# EAGLE board end of thursday lab v7 (EAGLE 9.7.0)
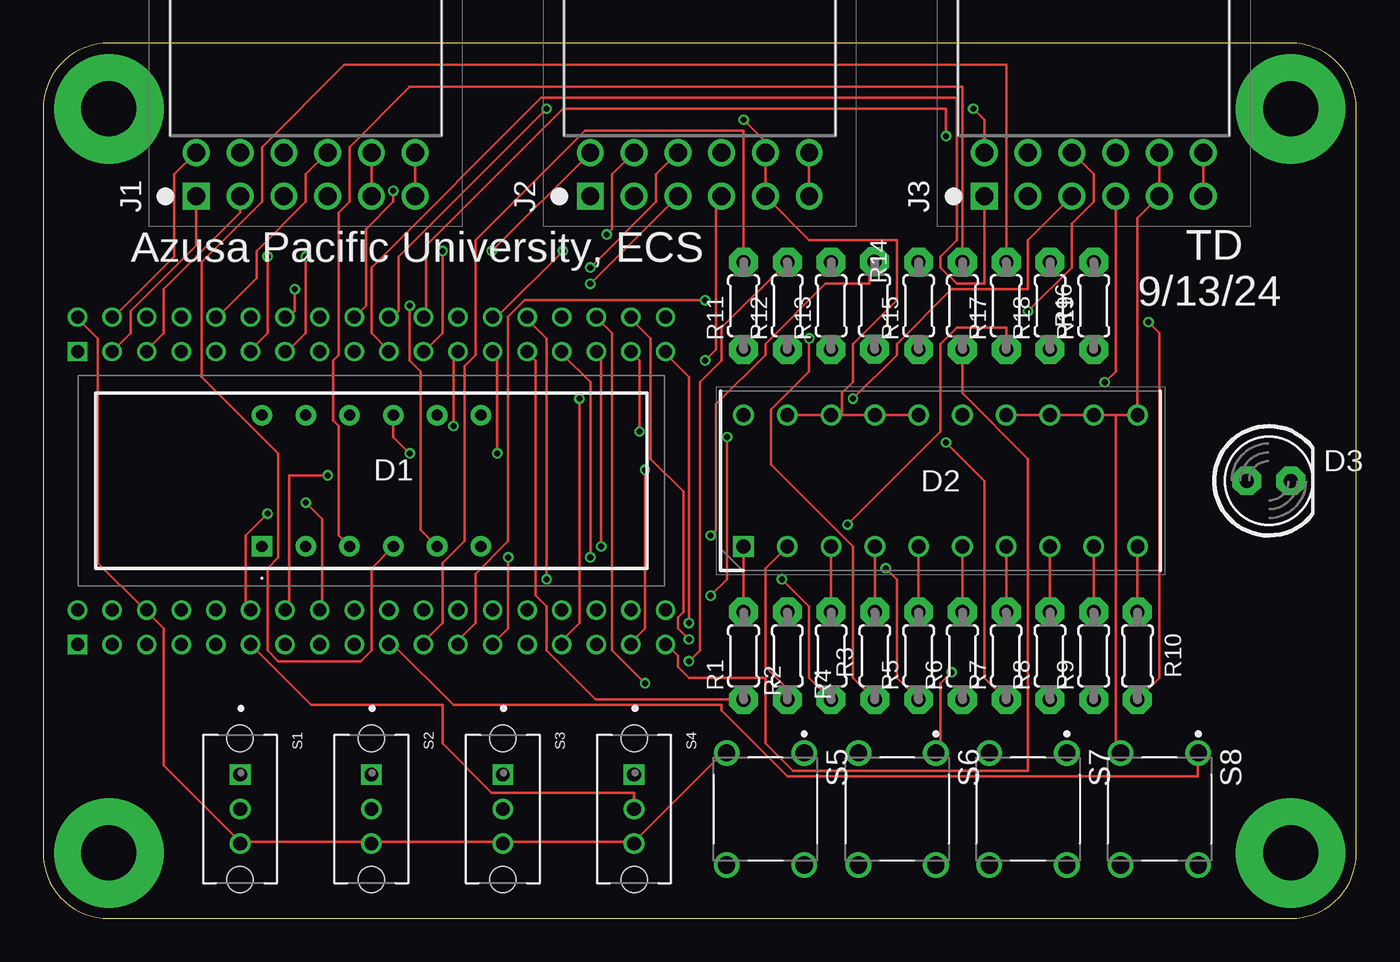
[diagram p0: board, top side]
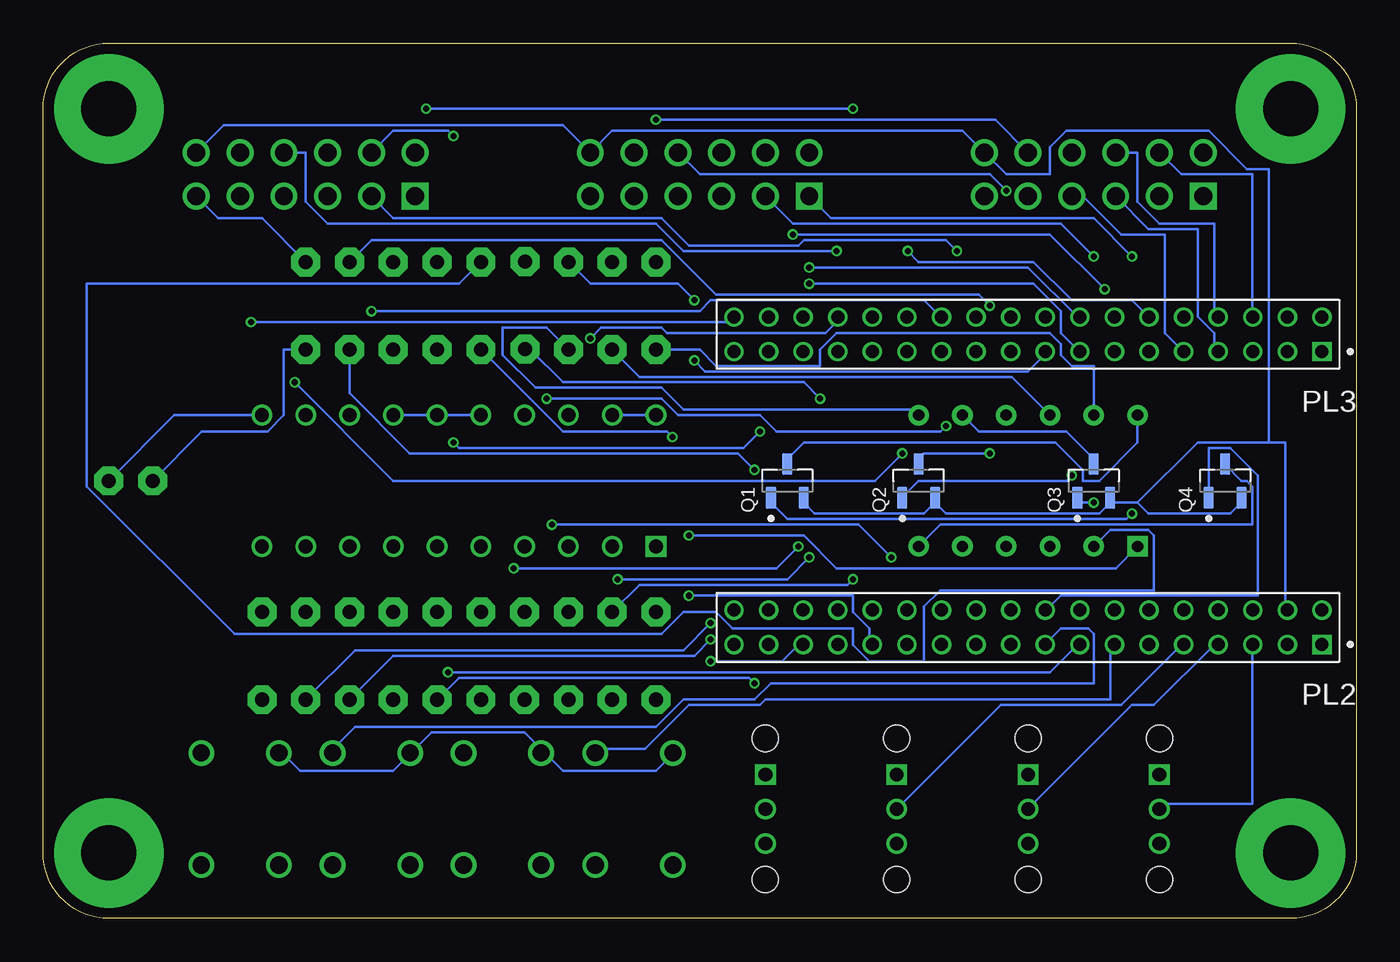
[diagram p1: board, bottom side, seen from below]

Size 76.2 x 50.8 mm. Coordinates in mm from the lower left corner, seen from the top.
Outline: 3.81,0 72.39,0 arc90 76.2,3.81 76.2,46.99 arc90 72.39,50.8 3.81,50.8 arc90 0,46.99 0,3.81 arc90 3.81,0
Copper layers (1*16): Top / Bottom
Stack-up Default Layer Stack: Top User Defined 0.035559375mm / Dielectric-1 User Defined 1.6mm / Bottom User Defined 0.035559375mm
Design rules: minimum copper width 6mil, minimum drill size 10mil, copper clearance wire_polygon to wire_polygon 6mil, copper clearance wire_polygon to pad_smd 6mil, copper clearance wire_polygon to via 6mil, copper clearance pad_smd to pad_smd 6mil, copper clearance pad_smd to via 6mil, copper clearance via to via 6mil, copper clearance smd to pad (same net) 6mil, copper clearance smd to via (same net) 6mil, copper clearance smd to smd (same net) 6mil, dimension clearance 15mil, restrict clearance 0mil, via restrict clearance 0mil, drill distance 6mil, keepout clearance 0mil

## Footprints (pad centres in the part's own frame; a part is rotated, then mirrored left to right if it is on the bottom)
LDQM282RI = drill 0.65 pad 1.192 square: 1 0,0 | drill 0.65 pad 1.192: 2 2.54,0; 3 5.08,0; 4 7.62,0; 5 10.16,0; 6 12.7,0; 7 12.7,7.62; 8 10.16,7.62; 9 7.62,7.62; 10 5.08,7.62; 11 2.54,7.62; 12 0,7.62
DIPS762W50P254L2527H825Q20N = drill 0.8 pad 1.2 square: 1 0,0 | drill 0.8 pad 1.2: 2 0,-2.54; 3 0,-5.08; 4 0,-7.62; 5 0,-10.16; 6 0,-12.7; 7 0,-15.24; 8 0,-17.78; 9 0,-20.32; 10 0,-22.86; 11 7.62,-22.86; 12 7.62,-20.32; 13 7.62,-17.78; 14 7.62,-15.24; 15 7.62,-12.7; 16 7.62,-10.16; 17 7.62,-7.62; 18 7.62,-5.08; 19 7.62,-2.54; 20 7.62,0
LED5MM = drill 0.813 pad 1.676 octagon: A -1.27,0; K 1.27,0
PMOD-SOCKET-FOR-HOST-BOARD = drill 1.04 pad 1.55 square: 1 0,0 | drill 1.04 pad 1.55: 2 2.54,0; 3 5.08,0; 4 7.62,0; 5 10.16,0; 6 12.7,0; 7 0,2.54; 8 2.54,2.54; 9 5.08,2.54; 10 7.62,2.54; 11 10.16,2.54; 12 12.7,2.54
MT_125_250 = drill 3.175 pad 6.35: 1 0,0
TE_4-1734506-1 = drill 0.75 pad 1.1 square: 1 0,0 | drill 0.75 pad 1.1: 2 0,-2; 3 2.007,0; 4 2.007,-2; 5 4.013,0; 6 4.013,-2; 7 6.02,0; 8 6.02,-2; 9 8.026,0; 10 8.026,-2; 11 10.033,0; 12 10.033,-2; 13 12.04,0; 14 12.04,-2; 15 14.046,0; 16 14.046,-2; 17 16.053,0; 18 16.053,-2; 19 18.059,0; 20 18.059,-2; 21 20.066,0; 22 20.066,-2; 23 22.073,0; 24 22.073,-2; 25 24.079,0; 26 24.079,-2; 27 26.086,0; 28 26.086,-2; 29 28.092,0; 30 28.092,-2; 31 30.099,0; 32 30.099,-2; 33 32.106,0; 34 32.106,-2; 35 34.112,0; 36 34.112,-2
SOT95P230X110-3N = smd 1.26 x 0.59: 1 -0.98,0.95; 2 -0.98,-0.95; 3 0.98,0
0204/5 = drill 0.813 pad 1.676 octagon: 1 -2.54,0; 2 2.54,0
SW_OS102011MS2QN1 = drill 0.8 square: 1 -2,0 | drill 0.8: 2 0,0; 3 2,0 | hole 1.5: -4.1,0; 4.1,0
SW_1825910-7 = drill 0.99: 1 -3.25,2.25; 2 3.25,2.25; 3 -3.25,-2.25; 4 3.25,-2.25

## Placement (x,y rotation side)
D1  [LDQM282RI]  12.7,21.59 0 top
D2  [DIPS762W50P254L2527H825Q20N]  40.64,21.59 90 top
D3  [LED5MM]  71.12,25.4 0 top
J1  [PMOD-SOCKET-FOR-HOST-BOARD]  8.89,41.91 0 top
J2  [PMOD-SOCKET-FOR-HOST-BOARD]  31.75,41.91 0 top
J3  [PMOD-SOCKET-FOR-HOST-BOARD]  54.61,41.91 0 top
MT1  [MT_125_250]  72.39,3.81 0 top
MT2  [MT_125_250]  3.81,3.81 0 top
MT3  [MT_125_250]  72.39,46.99 0 top
MT4  [MT_125_250]  3.81,46.99 0 top
PL2  [TE_4-1734506-1]  2,15.9 180 bottom
PL3  [TE_4-1734506-1]  2,32.9 180 bottom
Q1  [SOT95P230X110-3N]  33.02,25.4 90 bottom
Q2  [SOT95P230X110-3N]  25.4,25.4 90 bottom
Q3  [SOT95P230X110-3N]  15.24,25.4 90 bottom
Q4  [SOT95P230X110-3N]  7.62,25.4 90 bottom
R1  [0204/5]  40.64,15.24 90 top
R2  [0204/5]  43.18,15.24 270 top
R3  [0204/5]  45.72,15.24 90 top
R4  [0204/5]  48.26,15.24 90 top
R5  [0204/5]  50.8,15.24 90 top
R6  [0204/5]  53.34,15.24 90 top
R7  [0204/5]  55.88,15.24 90 top
R8  [0204/5]  58.42,15.24 90 top
R9  [0204/5]  60.96,15.24 90 top
R10  [0204/5]  63.5,15.24 90 top
R11  [0204/5]  40.64,35.56 90 top
R12  [0204/5]  43.18,35.56 90 top
R13  [0204/5]  45.72,35.56 90 top
R14  [0204/5]  48.24,35.58 90 top
R15  [0204/5]  50.8,35.56 90 top
R16  [0204/5]  53.34,35.56 90 top
R17  [0204/5]  55.88,35.56 90 top
R18  [0204/5]  58.42,35.56 90 top
R19  [0204/5]  60.96,35.56 90 top
S1  [SW_OS102011MS2QN1]  11.43,6.35 270 top
S2  [SW_OS102011MS2QN1]  19.05,6.35 270 top
S3  [SW_OS102011MS2QN1]  26.67,6.35 270 top
S4  [SW_OS102011MS2QN1]  34.29,6.35 270 top
S5  [SW_1825910-7]  41.91,6.35 270 top
S6  [SW_1825910-7]  49.56,6.35 270 top
S7  [SW_1825910-7]  57.15,6.35 270 top
S8  [SW_1825910-7]  64.77,6.35 270 top

## Library data of the parts
D1 = eagle-library-engr-240-f24; DESCRIPTION: LED Displays & Accessories LED Display; HEIGHT: 6.05mm; MANUFACTURER_NAME: Lumex; MANUFACTURER_PART_NUMBER: LDQ-M282RI; MOUSER_PART_NUMBER: 696-LDQ-M282RI; MOUSER_PRICE-STOCK: https://www.mouser.com/Search/Refine.aspx?Keyword=696-LDQ-M282RI
D2 = eagle-library-engr-240-f24; DESCRIPTION: LED Uni-Color Green 565nm 20-Pin PDIP; HEIGHT: 8.25mm; MANUFACTURER_NAME: Lite-On; MANUFACTURER_PART_NUMBER: LTA-1000G; MOUSER_PART_NUMBER: 859-LTA-1000G; MOUSER_PRICE-STOCK: https://www.mouser.co.uk/ProductDetail/Lite-On/LTA-1000G?qs=%2FTKcI5XXRKq0QINzVmwJHg%3D%3D
D3 J1-J3 MT1-MT4 PL2 PL3 R1-R19 = eagle-library-engr-240-f24
Q1-Q4 = eagle-library-engr-240-f24; MANUFACTURER: Nexperia; MAXIMUM_PACKAGE_HEIGHT: 1.10 mm; PARTREV: 1; SNAPEDA_PN: NX2301P; STANDARD: IPC 7351B
S1-S4 = eagle-library-engr-240-f24; MANUFACTURER: C&K; STANDARD: MANUFACTURER RECOMMENDATIONS
S5-S8 = eagle-library-engr-240-f24; MANUFACTURER: TE Connectivity; PARTREV: C10; STANDARD: Manufacturer Recommendation

## Nets
3.3V: J1.6 J1.12 J2.6 J2.12 J3.6 J3.12 PL2.4 Q1.2 Q2.2 Q3.2 Q4.2 R19.2
BAR_1: PL3.27 R1.1
BAR_2: PL3.28 R2.1
BAR_3: PL3.29 R3.1
BAR_4: PL3.30 R4.1
BAR_5: PL3.31 R5.1
BAR_6: PL3.32 R6.1
BAR_7: PL3.33 R7.1
BAR_8: PL3.34 R8.1
BAR_9: PL3.35 R9.1
BAR_10: PL3.36 R10.1
BUTTON_1: PL2.13 S5.1
BUTTON_2: PL2.15 S6.1
BUTTON_3: PL2.17 S7.1
BUTTON_4: PL2.19 S8.1
DIGIT_1: PL2.12 Q1.1
DIGIT_1_A: D1.12 Q1.3
DIGIT_2: PL2.14 Q2.1
DIGIT_2_A: D1.9 Q2.3
DIGIT_3: PL2.16 Q3.1
DIGIT_3_A: D1.8 Q3.3
DIGIT_4: PL2.18 Q4.1
DIGIT_4_A: D1.6 Q4.3
GND: D2.11 D2.12 D2.13 D2.14 D2.15 D2.16 D2.17 D2.18 D2.19 D2.20 D3.K J1.5 J1.11 J2.5 J2.11 J3.5 J3.11 PL2.6 PL3.2 S1.3 S2.3 S3.3 S4.3 S5.3 S6.3 S7.3 S8.3
N$1: D2.1 R1.2
N$2: D2.2 R2.2
N$3: D2.3 R3.2
N$4: D2.4 R4.2
N$5: D2.5 R5.2
N$6: D2.6 R6.2
N$7: D2.7 R7.2
N$8: D2.8 R8.2
N$9: D2.9 R9.2
N$10: D2.10 R10.2
N$11: D1.11 R11.1
N$12: D1.10 R12.1
N$13: D1.2 R15.2
N$14: D1.7 R13.1
N$15: D1.3 R16.2
N$16: D1.1 R14.2
N$17: D1.4 R17.2
N$18: D1.5 R18.2
N$20: D3.A R19.1
PMOD_1_1: J1.1 PL3.3
PMOD_1_2: J1.2 PL3.5
PMOD_1_3: J1.3 PL3.7
PMOD_1_4: J1.4 PL3.9
PMOD_1_5: J1.7 PL3.4
PMOD_1_6: J1.8 PL3.6
PMOD_1_7: J1.9 PL3.8
PMOD_1_8: J1.10 PL3.10
PMOD_2_1: J2.1 PL3.11
PMOD_2_2: J2.2 PL3.13
PMOD_2_3: J2.3 PL3.15
PMOD_2_4: J2.4 PL3.17
PMOD_2_5: J2.7 PL3.12
PMOD_2_6: J2.8 PL3.14
PMOD_2_7: J2.9 PL3.16
PMOD_2_8: J2.10 PL3.18
PMOD_3_1: J3.1 PL3.19
PMOD_3_2: J3.2 PL3.21
PMOD_3_3: J3.3 PL3.23
PMOD_3_4: J3.4 PL3.25
PMOD_3_5: J3.7 PL3.20
PMOD_3_6: J3.8 PL3.22
PMOD_3_7: J3.9 PL3.24
PMOD_3_8: J3.10 PL3.26
SEGMENT_A: PL2.21 R11.2
SEGMENT_B: PL2.23 R13.2
SEGMENT_C: PL2.25 R17.1
SEGMENT_D: PL2.27 R15.1
SEGMENT_DP: PL2.35 R16.1
SEGMENT_E: PL2.29 R14.1
SEGMENT_F: PL2.31 R12.2
SEGMENT_G: PL2.33 R18.1
SWITCH_1: PL2.5 S1.2
SWITCH_2: PL2.7 S2.2
SWITCH_3: PL2.9 S3.2
SWITCH_4: PL2.11 S4.2

## Tracks (layer width: path | path; a pad name or v marks a point on that pad's centre or on a via)
3.3V
  Top 0.152: J3.12 J3.6 | J1.12 J1.6 | J2.12 J2.6
  Bottom 0.152: 24.45,24.13 25.08,23.5 31.43,23.5 32.07,24.13 Q1.2 | 12.7,24.13 12.06,23.5 7.3,23.5 6.67,24.13 Q4.2 | 14.29,24.13 12.7,24.13 | 5.08,27.62 9.21,27.62 12.7,24.13 | 5.08,27.62 4.13,27.62 4.13,18.1 PL2.4 | 24.45,24.13 23.81,23.5 14.92,23.5 14.29,24.13 | 24.45,24.13 Q2.2 | 14.29,24.13 Q3.2 | R19.2 63.5,40.64 66.04,40.64 J3.6 | J3.12 65.72,46.04 46.04,46.04 J2.12 43.18,45.72 22.86,45.72 J1.12 20.32,43.18 17.78,43.18 17.78,44.77 16.83,45.72 8.57,45.72 6.35,43.5 5.08,43.5 5.08,27.62
BAR_1
  Top 0.152: R1.1 32.07,12.7 29.21,15.56 29.21,18.1 28.57,18.73 28.57,32.38 28.26,32.7 PL3.27
BAR_2  (via drill 0.35)
  Top 0.152: v29.21,19.68 29.21,33.66 28.26,34.61 PL3.28
  Bottom 0.152: v29.21,19.68 29.53,19.37 41.59,19.37 R2.1
BAR_3  (via drill 0.35)
  Top 0.152: v31.75,20.95 31.75,31.11 30.16,32.7 PL3.29 | v42.86,19.68 44.45,18.1 44.45,13.97 R3.1
  Bottom 0.152: v31.75,20.95 33.02,19.68 v42.86,19.68
BAR_4  (via drill 0.35)
  Top 0.152: v44.45,33.66 44.45,31.75 42.23,29.53 42.23,26.35 46.99,21.59 46.99,13.97 R4.1
  Bottom 0.152: v44.45,33.66 43.81,34.29 40.32,34.29 40.01,33.97 30.8,33.97 30.16,34.61 PL3.30
BAR_5  (via drill 0.35)
  Top 0.152: v32.38,21.59 32.38,32.7 PL3.31 | v48.9,20.32 49.53,19.68 49.53,13.97 R5.1
  Bottom 0.152: v32.38,21.59 33.66,20.32 v48.9,20.32
BAR_6  (via drill 0.35)
  Top 0.152: v34.92,13.65 33.02,15.56 33.02,33.97 32.38,34.61 PL3.32
  Bottom 0.152: v34.92,13.65 35.24,13.97 52.07,13.97 R6.1
BAR_7  (via drill 0.35)
  Top 0.152: v34.61,28.26 34.61,32.38 34.29,32.7 PL3.33 | v52.39,27.62 54.61,25.4 54.61,13.97 R7.1
  Bottom 0.152: v34.61,28.26 35.56,27.3 52.07,27.3 v52.39,27.62
BAR_8  (via drill 0.35)
  Top 0.152: v37.47,16.19 36.83,16.83 36.83,17.46 37.15,17.78 37.15,24.77 35.24,26.67 35.24,33.66 34.29,34.61 PL3.34
  Bottom 0.152: v37.47,16.19 38.42,15.24 55.88,15.24 R8.1
BAR_9  (via drill 0.35)
  Top 0.152: v37.47,17.14 37.47,31.43 36.2,32.7 PL3.35
  Bottom 0.152: v37.47,17.14 39.05,15.56 58.1,15.56 R9.1
BAR_10  (via drill 0.35)
  Top 0.152: v64.14,34.61 64.77,33.97 64.77,13.97 R10.1
  Bottom 0.152: v64.14,34.61 36.2,34.61 PL3.36
BUTTON_1
  Bottom 0.152: PL2.13 14.29,15.88 14.29,12.7 34.29,12.7 34.61,12.38 38.73,12.38 41.27,9.84 44.13,9.84 S5.1
BUTTON_2  (via drill 0.35)
  Top 0.152: v52.7,14.29 52.07,13.65 52.07,9.84 S6.1
  Bottom 0.152: v52.7,14.29 17.78,14.29 16.19,15.88 PL2.15
BUTTON_3
  Bottom 0.152: PL2.17 17.78,16.19 17.14,16.83 15.56,16.83 15.24,16.51 15.24,13.65 33.97,13.65 34.92,12.7 39.05,12.7 40.64,11.11 58.1,11.11 59.37,9.84 S7.1
BUTTON_4
  Top 0.152: PL2.19 20.32,15.88 23.81,12.38 39.37,12.38 39.37,12.06 43.18,8.26 66.99,8.26 66.99,9.53 S8.1
DIGIT_1  (via drill 0.35)
  Top 0.152: v13.02,23.5 11.75,22.23 11.75,18.1 PL2.12
  Bottom 0.152: v13.02,23.5 13.34,23.18 33.02,23.18 33.97,24.13 Q1.1
DIGIT_1_A
  Bottom 0.152: D1.12 12.7,27.62 14.92,25.4 15.88,25.4 15.88,26.04 17.46,27.62 32.07,27.62 33.02,26.67 Q1.3
DIGIT_2  (via drill 0.35)
  Top 0.152: v16.51,25.72 14.29,25.72 14.29,18.1 PL2.14
  Bottom 0.152: v16.51,25.72 16.83,25.4 25.4,25.4 26.35,24.45 Q2.1
DIGIT_2_A  (via drill 0.35)
  Top 0.152: v21.27,26.99 20.32,27.94 D1.9
  Bottom 0.152: v21.27,26.99 25.08,26.99 25.4,26.67 Q2.3
DIGIT_3  (via drill 0.35)
  Top 0.152: v15.24,24.13 16.19,23.18 16.19,18.1 PL2.16
  Bottom 0.152: v15.24,24.13 16.19,24.13 Q3.1
DIGIT_3_A
  Bottom 0.152: D1.8 21.91,28.26 16.83,28.26 15.24,26.67 Q3.3
DIGIT_4
  Bottom 0.152: Q4.1 8.57,24.45 8.57,27.3 7.3,27.3 5.71,25.72 5.71,18.73 17.14,18.73 17.78,18.1 PL2.18
DIGIT_4_A
  Bottom 0.152: D1.6 24.13,22.86 6.03,22.86 6.03,25.08 6.35,25.4 6.67,25.4 7.62,26.35 Q4.3
GND  (via drill 0.35)
  Top 0.152: J1.11 J1.5 | v40.64,46.35 41.91,45.09 J2.11 J2.5 44.45,39.37 49.53,39.37 49.53,35.88 46.99,33.34 46.99,31.11 46.35,30.48 46.35,29.21 | D2.19 D2.18 46.35,29.21 | 46.35,29.21 D2.17 D2.16 | J3.11 J3.5 63.5,40.64 D2.11 62.23,29.21 | D2.14 D2.13 D2.12 62.23,29.21 | 34.29,4.45 39.37,9.53 S5.3 | 11.43,4.45 6.99,8.89 6.99,16.83 6.03,17.78 PL2.6 5.71,18.1 3.17,20.64 3.17,33.66 2.22,34.61 PL3.2 | 11.43,4.45 19.05,4.45 | 11.43,4.45 S1.3 | 19.05,4.45 26.67,4.45 | 19.05,4.45 S2.3 | 26.67,4.45 34.29,4.45 | 34.29,4.45 S4.3 | 26.67,4.45 S3.3 | 62.23,29.21 62.23,9.84 S8.3
  Bottom 0.152: J1.11 20.95,46.35 v40.64,46.35 | D2.19 D2.20 | D2.16 D2.15 D2.14 | D3.K 68.58,29.21 D2.11 | S8.3 62.23,9.53 61.28,8.57 55.88,8.57 54.93,9.53 S7.3 54.61,9.84 53.66,10.79 48.26,10.79 47.31,9.84 S6.3 46.99,9.53 46.04,8.57 40.64,8.57 39.69,9.53 S5.3
N$1
  Top 0.152: R1.2 D2.1
N$2
  Top 0.152: D2.2 41.91,20.32 41.91,14.61 43.18,13.34 R2.2
N$3
  Top 0.152: R3.2 D2.3
N$4
  Top 0.152: R4.2 D2.4
N$5
  Top 0.152: R5.2 D2.5
N$6
  Top 0.152: R6.2 D2.6
N$7
  Top 0.152: R7.2 D2.7
N$8
  Top 0.152: R8.2 D2.8
N$9
  Top 0.152: R9.2 D2.9
N$10
  Top 0.152: R10.2 D2.10
N$11
  Bottom 0.152: D1.11 15.24,32.07 16.51,32.07 17.14,32.7 17.14,33.34 17.78,33.97 30.16,33.97 31.11,33.02 31.11,32.07 37.15,32.07 38.1,33.02 R11.1
N$12
  Bottom 0.152: D1.10 20,31.43 41.59,31.43 R12.1
N$13
  Bottom 0.152: D1.2 14.29,22.54 12.06,22.54 11.75,22.23 11.75,19.05 24.13,19.05 25.08,18.1 25.08,14.92 28.26,14.92 29.21,15.88 29.21,16.83 36.2,16.83 37.15,17.78 39.05,17.78 40.32,16.51 65.09,16.51 73.66,25.08 73.66,36.83 52.07,36.83 R15.2
N$14
  Bottom 0.152: D1.7 25.72,29.53 39.05,29.53 40.32,30.8 47.62,30.8 49.53,32.7 49.53,34.29 46.99,34.29 R13.1
N$15
  Top 0.152: D1.3 17.14,22.23 17.14,28.57 16.83,28.89 16.83,32.38 17.14,32.7 17.14,40.96 17.78,41.59 17.78,44.77 21.27,48.26 53.34,48.26 R16.2
N$16  (via drill 0.35)
  Top 0.152: v38.73,22.23 39.05,22.54 39.05,29.84 41.91,32.7 41.91,33.34 45.4,36.83 47.94,36.83 47.94,38.1 R14.2
  Bottom 0.152: D1.1 13.97,20.32 30.16,20.32 32.07,22.23 v38.73,22.23
N$17
  Top 0.152: D1.4 19.05,20.32 19.05,15.56 18.41,14.92 13.65,14.92 13.02,15.56 13.02,20.32 13.65,20.95 13.65,26.99 9.21,31.43 9.21,38.1 12.7,41.59 12.7,44.77 17.46,49.53 55.88,49.53 R17.2
N$18  (via drill 0.35)
  Top 0.152: D1.5 21.91,22.54 21.91,31.75 21.27,32.38 v21.27,35.56
  Bottom 0.152: v21.27,35.56 21.91,36.2 37.15,36.2 40.32,39.37 57.15,39.37 R18.2
N$20
  Bottom 0.152: D3.A 66.99,28.26 63.18,28.26 62.23,29.21 62.23,33.02 R19.1
PMOD_1_1
  Top 0.152: J1.1 8.89,39.05 5.08,35.24 5.08,33.97 4.13,33.02 PL3.3
PMOD_1_2
  Top 0.152: J1.2 11.43,40.96 6.99,36.51 6.99,33.97 6.03,33.02 PL3.5
PMOD_1_3
  Bottom 0.152: J1.3 12.06,40.01 9.21,40.01 9.21,34.92 8.26,33.97 8.26,33.02 PL3.7
PMOD_1_4
  Bottom 0.152: J1.4 15.88,41.91 13.65,39.69 11.11,39.69 11.11,33.97 10.16,33.02 PL3.9
PMOD_1_5
  Top 0.152: J1.7 7.62,43.18 7.62,38.42 4.13,34.92 PL3.4
PMOD_1_6
  Bottom 0.152: J1.8 10.16,43.18 6.03,43.18 6.03,34.92 PL3.6
PMOD_1_7
  Bottom 0.152: J1.9 12.7,44.45 12.7,41.59 11.43,40.32 8.26,40.32 8.26,34.92 PL3.8
PMOD_1_8
  Top 0.152: J1.10 15.24,43.18 15.24,41.59 12.38,38.73 12.38,37.15 10.16,34.92 PL3.10
PMOD_2_1  (via drill 0.35)
  Top 0.152: v13.02,38.42 13.02,33.97 12.06,33.02 PL3.11
  Bottom 0.152: v13.02,38.42 15.24,40.64 30.48,40.64 J2.1
PMOD_2_2  (via drill 0.35)
  Top 0.152: v15.24,38.42 15.24,33.97 14.29,33.02 PL3.13
  Bottom 0.152: v15.24,38.42 17.14,40.32 32.7,40.32 J2.2
PMOD_2_3  (via drill 0.35)
  Top 0.152: J2.3 v31.75,36.83
  Bottom 0.152: v31.75,36.83 18.73,36.83 17.14,35.24 17.14,33.97 16.19,33.02 PL3.15
PMOD_2_4  (via drill 0.35)
  Top 0.152: v38.42,32.38 39.05,33.02 39.05,41.59 J2.4
  Bottom 0.152: v38.42,32.38 37.78,31.75 19.05,31.75 18.1,32.7 PL3.17
PMOD_2_5  (via drill 0.35)
  Top 0.152: J2.7 v26.04,38.73
  Bottom 0.152: v26.04,38.73 25.4,38.1 18.73,38.1 16.51,35.88 13.02,35.88 12.06,34.92 PL3.12
PMOD_2_6  (via drill 0.35)
  Top 0.152: v14.61,36.51 14.61,35.24 14.29,34.92 PL3.14 | v32.7,39.69 33.02,40.01 33.02,43.18 J2.8
  Bottom 0.152: v14.61,36.51 17.78,39.69 v32.7,39.69
PMOD_2_7  (via drill 0.35)
  Top 0.152: v31.75,37.78 35.56,41.59 35.56,43.18 J2.9
  Bottom 0.152: v31.75,37.78 19.05,37.78 16.19,34.92 PL3.16
PMOD_2_8  (via drill 0.35)
  Top 0.152: v20.32,42.23 20.32,41.59 18.73,40.01 18.73,35.56 18.1,34.92 PL3.18
  Bottom 0.152: v20.32,42.23 21.27,43.18 38.1,43.18 J2.10
PMOD_3_1
  Top 0.152: J3.1 54.61,36.83 53.02,36.83 52.07,37.78 52.07,38.42 53.02,39.37 53.02,47.62 28.89,47.62 19.05,37.78 19.05,33.97 20,33.02 PL3.19
PMOD_3_2  (via drill 0.35)
  Top 0.152: v23.18,38.73 23.18,33.97 22.23,33.02 PL3.21
  Bottom 0.152: v23.18,38.73 23.81,39.37 32.07,39.37 32.38,39.05 38.73,39.05 40.32,40.64 55.88,40.64 J3.2
PMOD_3_3  (via drill 0.35)
  Top 0.152: v23.81,28.57 23.81,32.7 PL3.23 | v46.99,30.16 49.53,32.7 49.53,33.34 52.7,36.51 57.15,36.51 57.15,39.37 J3.3
  Bottom 0.152: v23.81,28.57 24.13,28.26 33.66,28.26 34.61,29.21 39.37,29.21 40.32,30.16 v46.99,30.16
PMOD_3_4  (via drill 0.35)
  Top 0.152: v26.35,26.99 26.35,32.7 PL3.25 | v61.59,31.11 62.23,31.75 J3.4
  Bottom 0.152: v26.35,26.99 27.94,25.4 55.88,25.4 v61.59,31.11
PMOD_3_5  (via drill 0.35)
  Top 0.152: v29.21,46.99 20.64,38.42 20.64,35.24 20.32,34.92 PL3.20 | v53.98,46.99 54.61,46.35 J3.7
  Bottom 0.152: v53.98,46.99 v29.21,46.99
PMOD_3_6  (via drill 0.35)
  Top 0.152: v52.39,45.4 52.39,46.99 30.16,46.99 22.23,39.05 22.23,34.92 PL3.22
  Bottom 0.152: v52.39,45.4 52.7,45.72 55.88,45.72 J3.8
PMOD_3_7  (via drill 0.35)
  Top 0.152: v57.15,35.24 59.69,37.78 59.69,40.32 60.96,41.59 60.96,43.18 J3.9
  Bottom 0.152: v57.15,35.24 38.1,35.24 37.47,35.88 25.08,35.88 24.13,34.92 PL3.24
PMOD_3_8  (via drill 0.35)
  Top 0.152: v30.16,38.73 26.35,34.92 PL3.26
  Bottom 0.152: v30.16,38.73 39.05,38.73 40.64,40.32 59.69,40.32 60.96,41.59 60.96,44.45 J3.10
SEGMENT_A
  Top 0.152: R11.2 40.64,45.72 31.43,45.72 25.08,39.37 25.08,32.7 24.45,32.07 24.45,21.91 23.18,20.64 23.18,17.14 22.23,16.19 PL2.21
SEGMENT_B  (via drill 0.35)
  Top 0.152: v38.42,35.88 27.94,35.88 26.99,34.92 26.99,21.91 25.08,20 25.08,17.14 24.13,16.19 PL2.23
  Bottom 0.152: v38.42,35.88 39.37,36.83 44.45,36.83 R13.2
SEGMENT_C  (via drill 0.35)
  Top 0.152: v26.99,20.95 26.99,16.83 26.35,16.19 PL2.25 | v46.67,22.86 52.07,28.26 52.07,33.34 53.02,34.29 55.88,34.29 R17.1
  Bottom 0.152: v26.99,20.95 28.89,22.86 v46.67,22.86
SEGMENT_D  (via drill 0.35)
  Top 0.152: v38.73,18.73 39.69,19.68 v39.69,27.94
  Bottom 0.152: v38.73,18.73 29.21,18.73 29.21,17.78 28.26,16.83 28.26,16.19 PL2.27 | v39.69,27.94 40.01,28.26 46.04,28.26 R15.1
SEGMENT_DP
  Top 0.152: R16.1 53.34,30.48 57.15,26.67 57.15,8.57 43.5,8.57 41.91,10.16 41.91,13.97 37.47,13.97 36.83,14.61 36.83,15.24 36.2,15.88 PL2.35
SEGMENT_E  (via drill 0.35)
  Top 0.152: v31.11,30.16 31.11,17.14 30.16,16.19 PL2.29
  Bottom 0.152: v31.11,30.16 32.07,31.11 46.04,31.11 47.94,33.02 R14.1
SEGMENT_F  (via drill 0.35)
  Top 0.152: v37.47,14.92 38.1,15.56 38.1,31.11 39.37,32.38 39.37,34.29 R12.2
  Bottom 0.152: v37.47,14.92 33.34,14.92 32.38,15.88 PL2.31
SEGMENT_G  (via drill 0.35)
  Top 0.152: v34.92,26.04 34.92,16.83 34.29,16.19 PL2.33
  Bottom 0.152: v34.92,26.04 35.88,26.99 54.93,26.99 58.42,30.48 R18.1
SWITCH_1
  Bottom 0.152: S1.2 11.11,6.67 6.03,6.67 6.03,15.88 PL2.5
SWITCH_2
  Bottom 0.152: S2.2 13.02,12.38 11.75,12.38 8.26,15.88 PL2.7
SWITCH_3
  Bottom 0.152: S3.2 20.64,12.38 13.65,12.38 10.16,15.88 PL2.9
SWITCH_4
  Top 0.152: S4.2 34.29,7.3 26.04,7.3 23.18,10.16 23.18,12.38 15.56,12.38 12.06,15.88 PL2.11

## Text on the board
Top: Azusa Pacific University, ECS
SilkscreenTop: Azusa Pacific University, ECS | TD / 9/13/24